# EAGLE board D-M-003_基板データ (EAGLE 9.7.0)
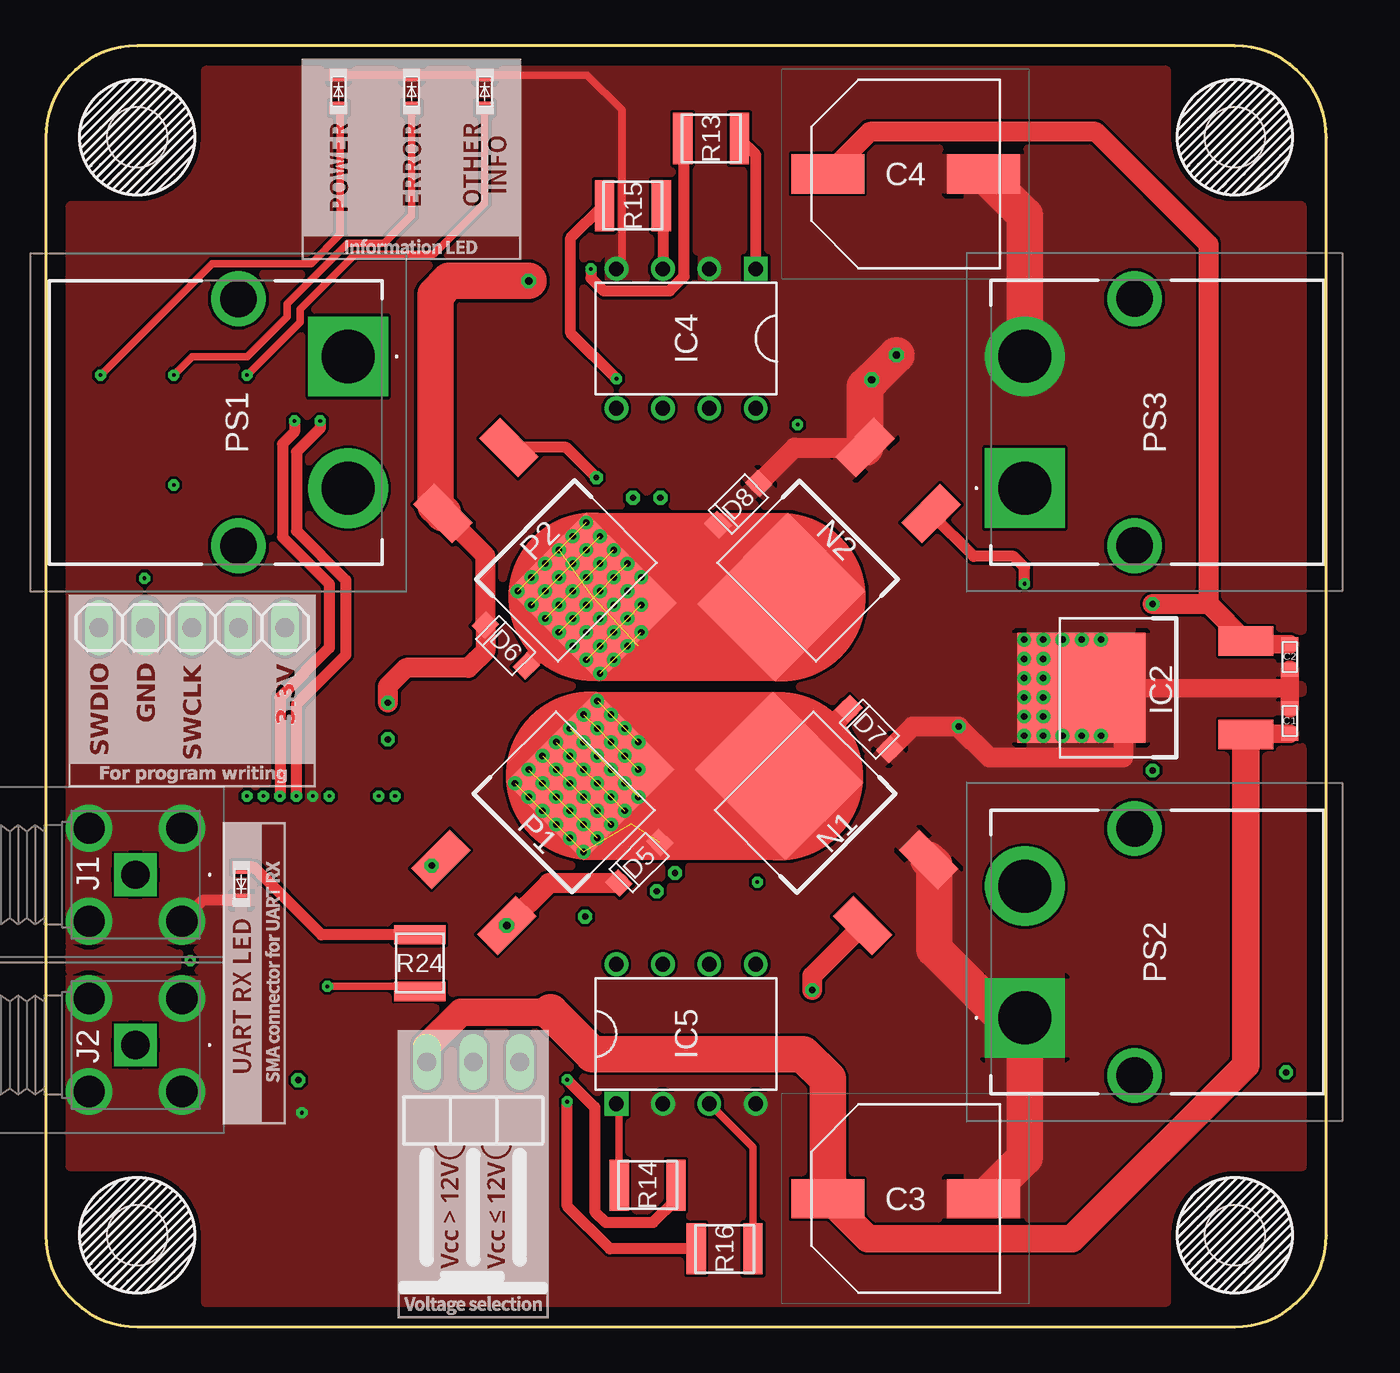
[diagram p0: board, top side]
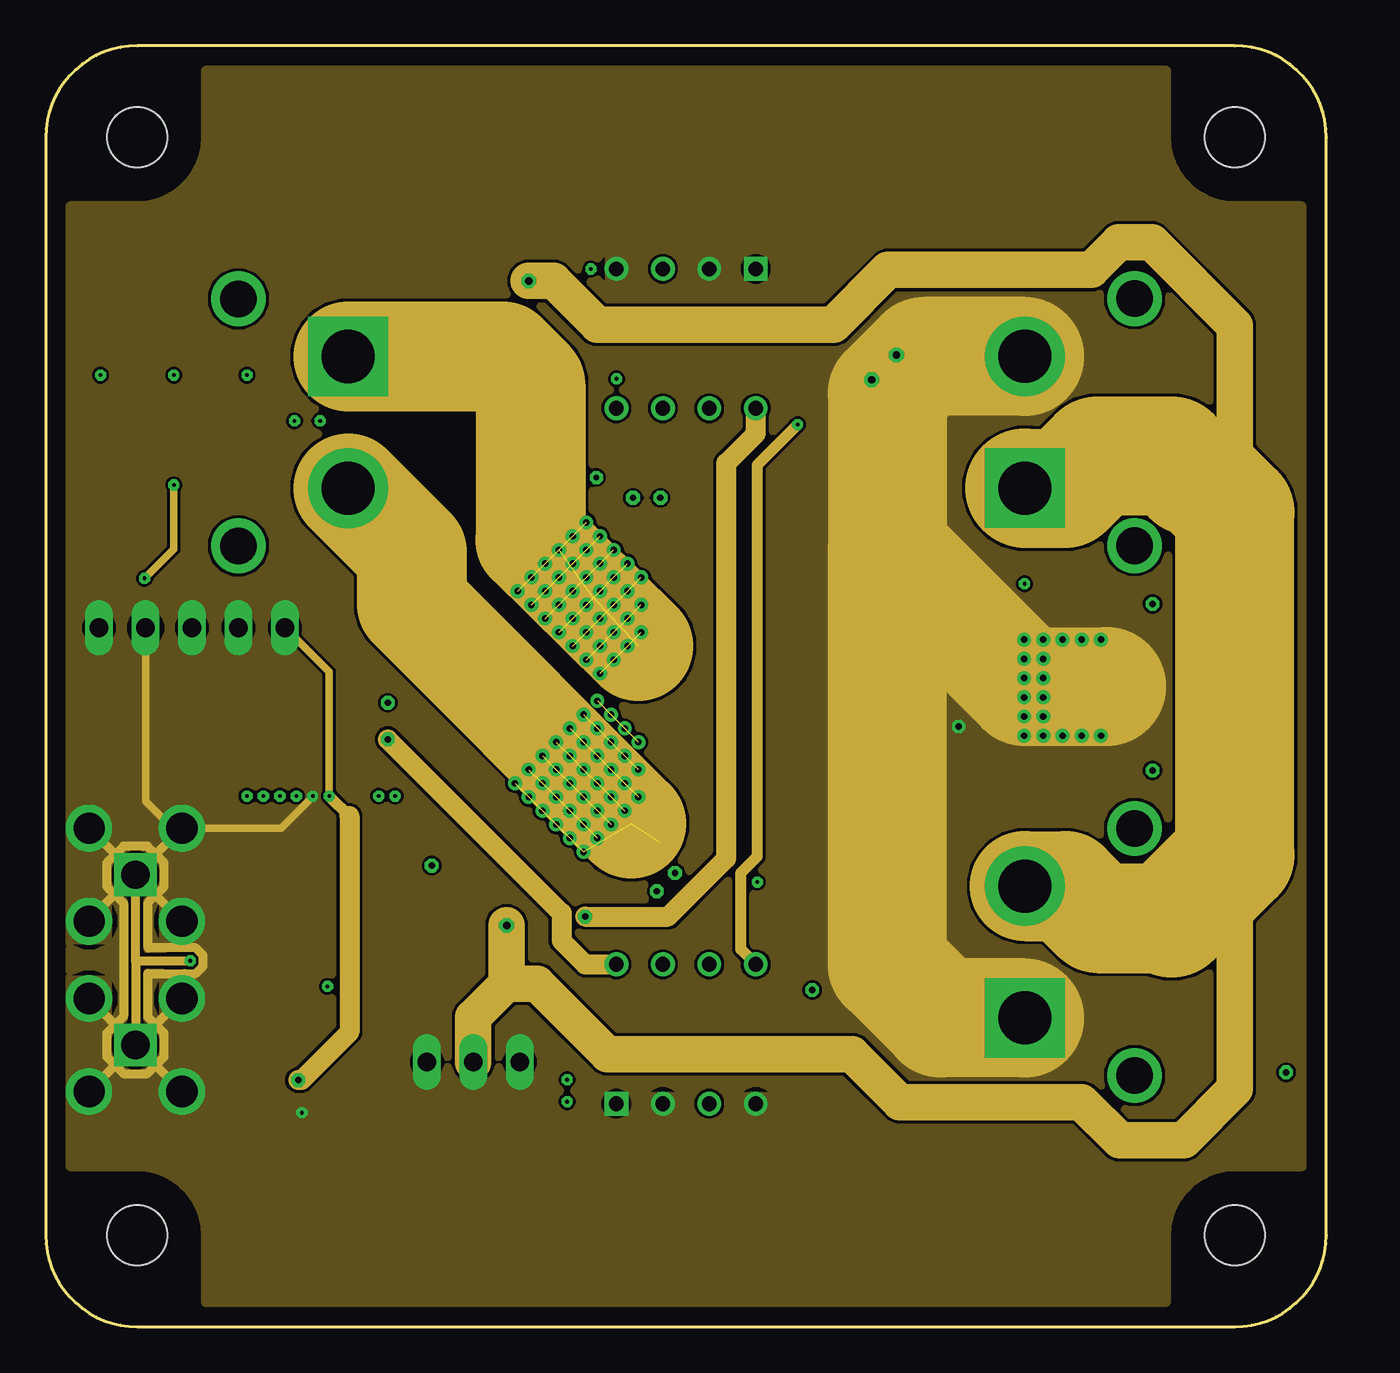
[diagram p1: board, inner layer Route2]
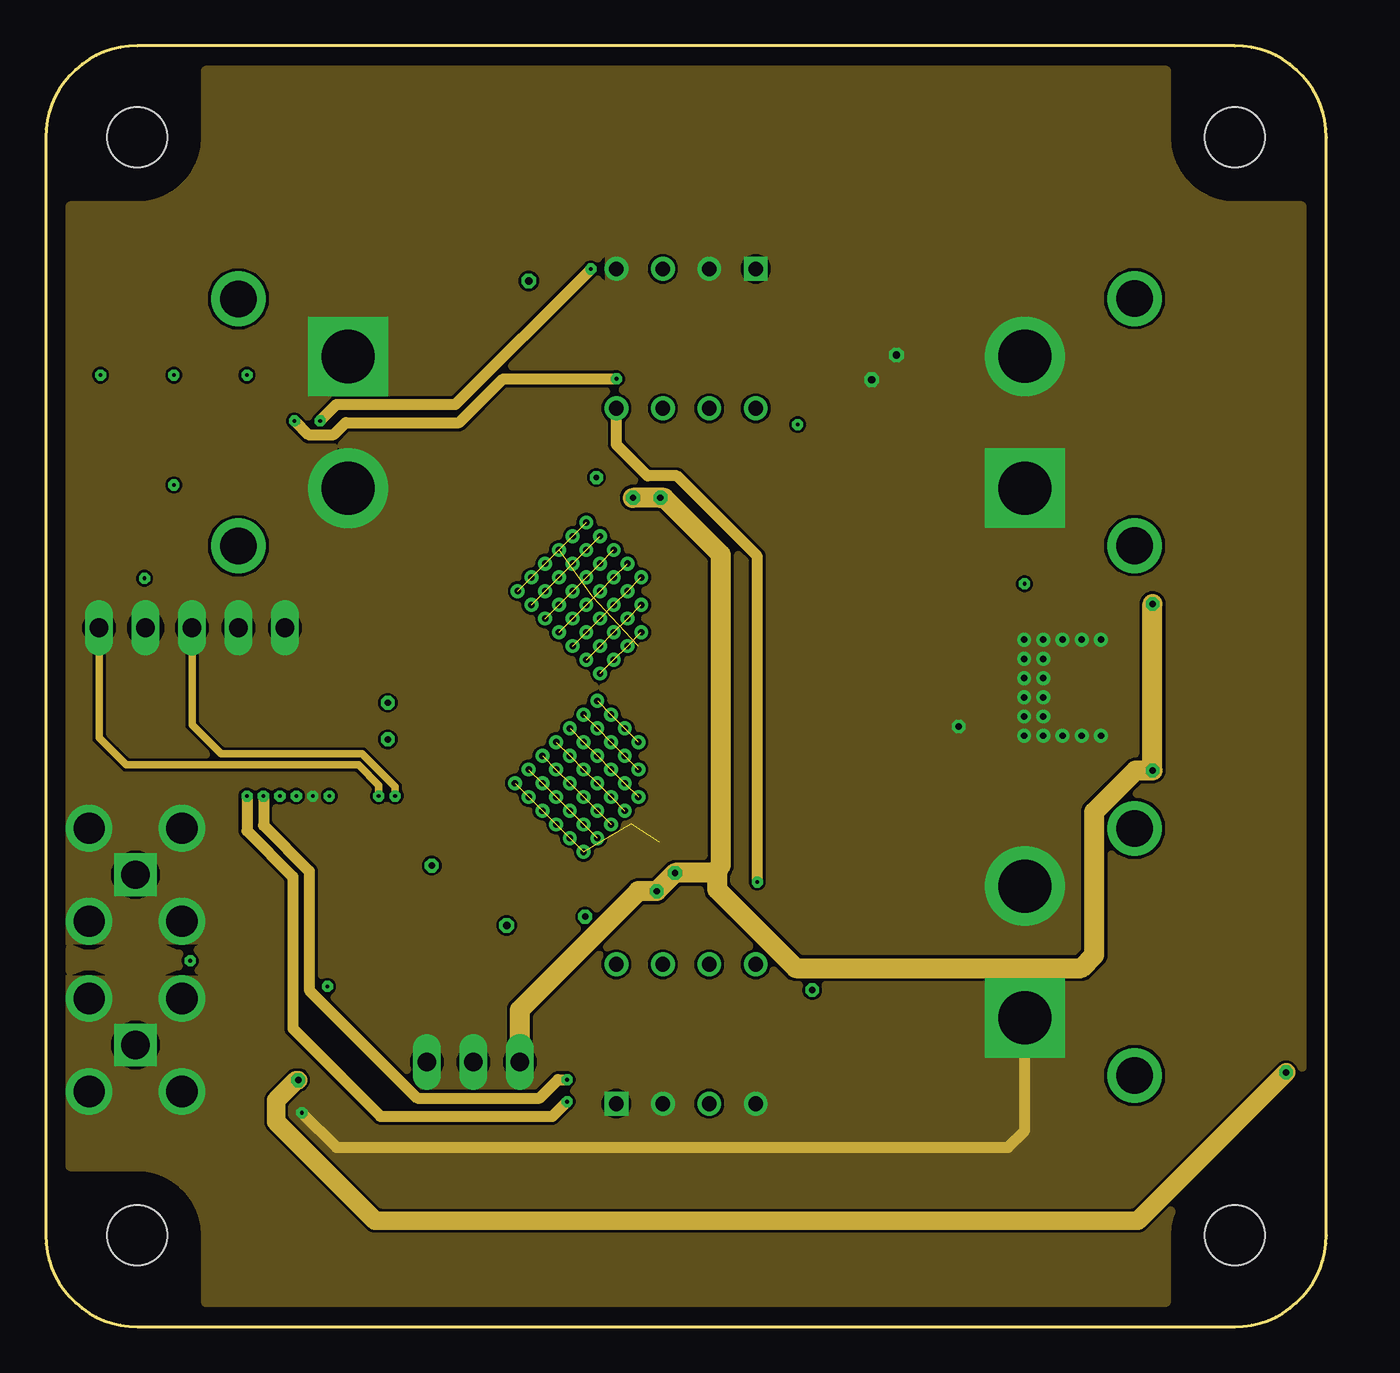
[diagram p2: board, inner layer Route15]
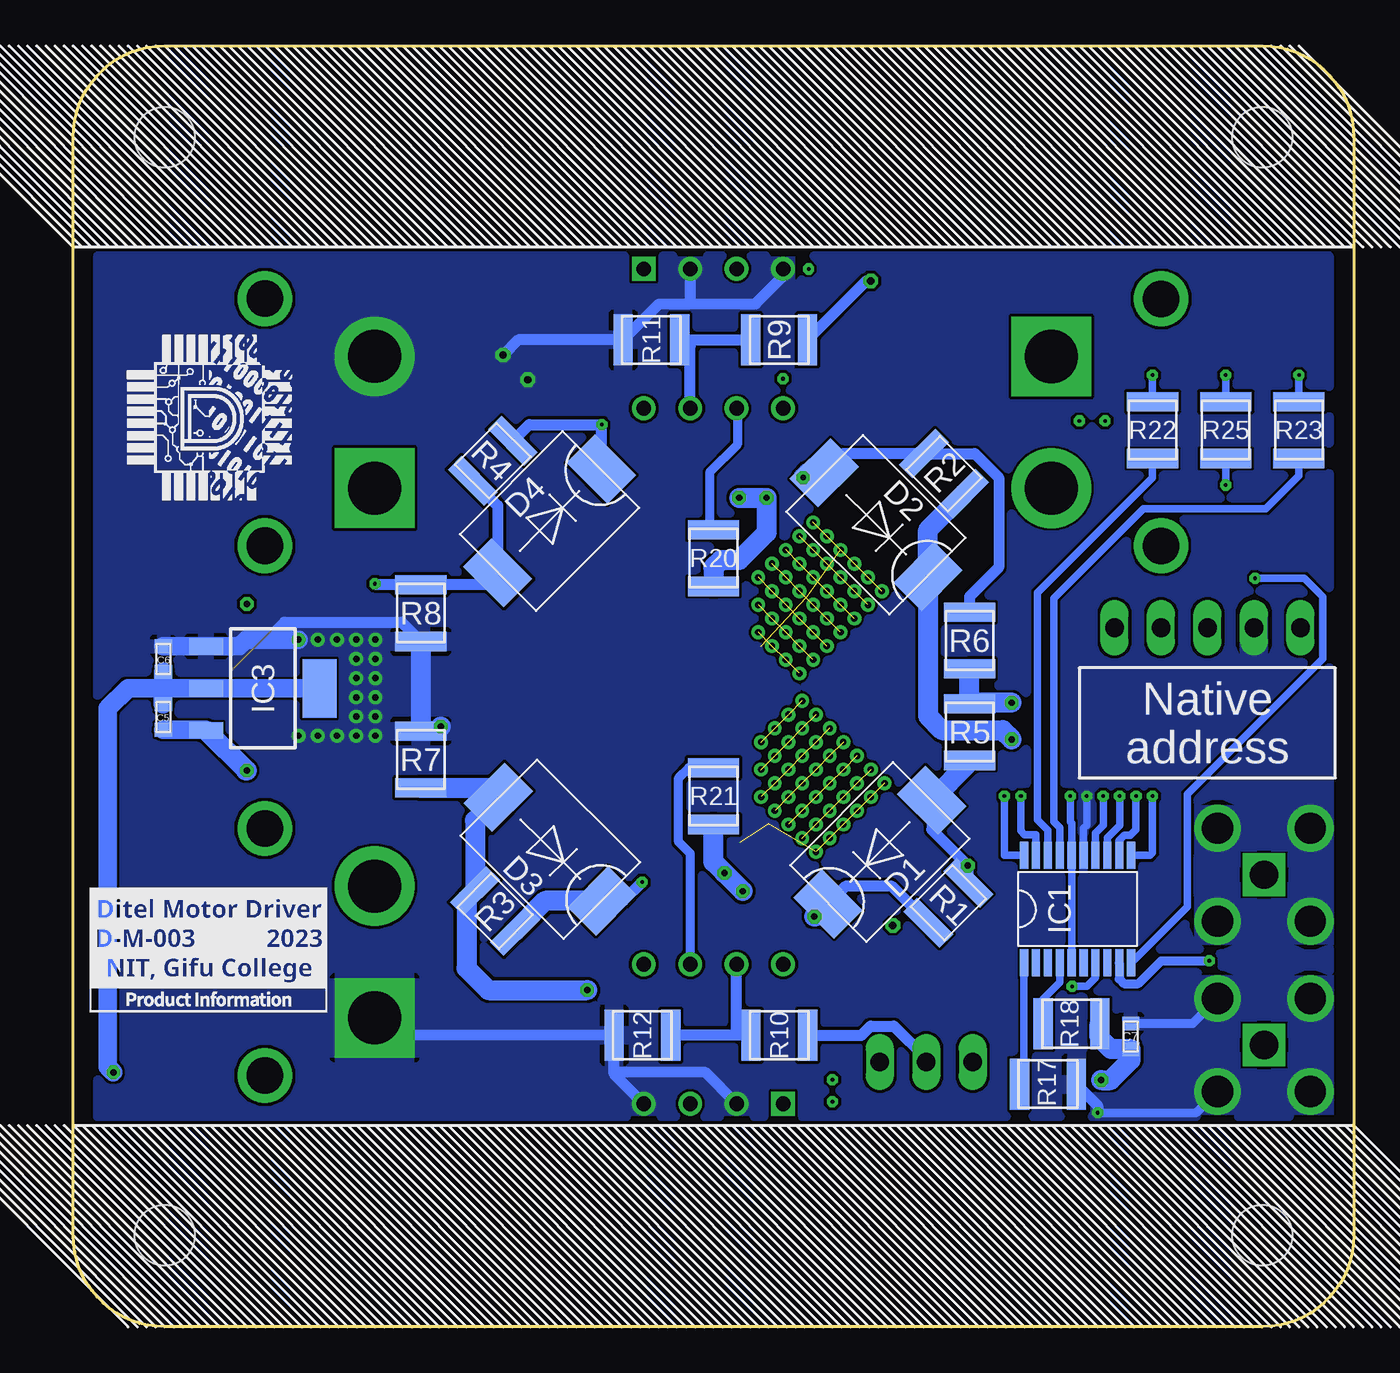
[diagram p3: board, bottom side, seen from below]

Size 70 x 70 mm. Coordinates in mm from the lower left corner, seen from the top.
Outline: 0,5 arc90 5,0 65,0 arc90 70,5 70,65 arc90 65,70 5,70 arc90 0,65 0,5
Copper layers (1+2*15+16): Top / Route2 / Route15 / Bottom
Stack-up 4 Layer Stack: Top SilkScreen Epoxy Ink / Top SolderMask SR:Green 0.0254mm Dk 4.3 / Top Surface Finish Lead-Free 0.02mm / Top CuFoil:007 0.035mm / Dielectric-1 Prepreg:001 0.064mm / Dielectric-2 Prepreg:001 0.064mm / Route2 CuFoil:007 0.035mm / Dielectric-3 Core:066 0.711mm / Route15 CuFoil:007 0.035mm / Dielectric-4 Prepreg:001 0.064mm / Dielectric-5 Prepreg:001 0.064mm / Bottom CuFoil:007 0.035mm / Bottom Surface Finish Lead-Free 0.02mm / Bottom SolderMask SR:Green 0.0254mm Dk 4.3 / Bottom SilkScreen Epoxy Ink
Design rules "default *": minimum track width 6mil, minimum drill 0.35mm, track to track 6mil, track to pad 6mil, pad to pad 6mil, via to via 6mil, smd to smd 6mil, copper to edge 40mil, drill to drill 6mil, minimum pad ring 10mil, minimum via ring 8mil, stop-mask expansion 4mil, vias tented up to drill 0mil, thermal gap 10mil
Holes 3.3 mm at 65,65 65,5 5,5 5,65

## Footprints (pad centres in the part's own frame; a part is rotated, then mirrored left to right if it is on the bottom)
CAPC1608X90N = smd 0.75 x 0.94: 1 -0.7,0; 2 0.7,0
CAPAE1030X1050N = smd 4 x 2.15: 1 -4.25,0; 2 4.25,0
DIOM7959X262N = smd 2.2 x 3.15: 1 -4.008,0; 2 4.008,0
SODFL3618X110N = smd 1 x 1.13: 1 -1.575,0; 2 1.575,0
SOP65P640X120-20N = smd 1.475 x 0.45: 1 -2.938,2.925; 2 -2.938,2.275; 3 -2.938,1.625; 4 -2.938,0.975; 5 -2.938,0.325; 6 -2.938,-0.325; 7 -2.938,-0.975; 8 -2.938,-1.625; 9 -2.938,-2.275; 10 -2.938,-2.925; 11 2.938,-2.925; 12 2.938,-2.275; 13 2.938,-1.625; 14 2.938,-0.975; 15 2.938,-0.325; 16 2.938,0.325; 17 2.938,0.975; 18 2.938,1.625; 19 2.938,2.275; 20 2.938,2.925
NJM7812SDL1 = smd 6 x 7: GND 0,9 | smd 1.6 x 3: VIN -2.55,0; VOUT 2.55,0
SOT230P700X180-4N = smd 1.85 x 0.9: 1 -3.1,2.3; 2 -3.1,0; 3 -3.1,-2.3 | smd 1.85 x 3.2: 4 3.1,0
DIP762W60P254L966H485Q8N = drill 0.8 pad 1.2 square: 1 -3.81,3.81 | drill 0.8 pad 1.2: 2 -3.81,1.27; 3 -3.81,-1.27; 4 -3.81,-3.81; 5 3.81,-3.81; 6 3.81,-1.27; 7 3.81,1.27; 8 3.81,3.81
S037TGG = drill 1.55 pad 2.325 square: 1 0,0 | drill 1.7 pad 2.55: 2 -2.54,-2.54; 3 2.54,-2.54; 4 2.54,2.54; 5 -2.54,2.54
1X03/90 = drill 1.016 long: 1 -2.54,-3.81; 2 0,-3.81; 3 2.54,-3.81
1X05 = drill 1.016 long: 1 -5.08,0; 2 -2.54,0; 3 0,0; 4 2.54,0; 5 5.08,0
LEDC1608X36N = smd 0.7 x 0.95: 1 -0.9,0; 2 0.9,0
NP52N06SLG-E1-AY = smd 6 x 7: D 0,0.11 | smd 1.6 x 3: G -2.55,-8.89; S 2.55,-8.89
TJ60S04M3L = smd 6 x 7: D 0,0.11 | smd 1.6 x 3: G -2.55,-8.89; S 2.55,-8.89
XT60PWM = drill 2.9 pad 4.35 square: 1 0,0 | drill 2.9 pad 4.35: 2 7.2,0 | drill 2 pad 3: MH1 -3.15,-6; MH2 10.35,-6
RESC3226X70N = smd 1.05 x 2.8: 1 -1.55,0; 2 1.55,0

## Placement (x,y rotation side)
C1  GRM188F11H104ZA01D  [CAPC1608X90N]  68,33.1 90 top
C2  GRM188F11H104ZA01D  [CAPC1608X90N]  68,36.6 90 top
C3  63SGV100M10X10.5  [CAPAE1030X1050N]  47,7 0 top
C4  63SGV100M10X10.5  [CAPAE1030X1050N]  47,63 0 top
C5  GRM188F11H104ZA01D  [CAPC1608X90N]  65.07,33.32 270 bottom
C6  GRM188F11H104ZA01D  [CAPC1608X90N]  65.07,36.49 270 bottom
C7  GRM188F11H104ZA01D  [CAPC1608X90N]  12.19,15.87 270 bottom
D1  SK54  [DIOM7959X262N]  25.91,25.94 45 bottom
D2  SK54  [DIOM7959X262N]  26.11,43.83 135 bottom
D3  SK54  [DIOM7959X262N]  43.92,26.1 135 bottom
D4  SK54  [DIOM7959X262N]  43.97,44.03 225 bottom
D5  GS1010FL  [SODFL3618X110N]  32.44,25.36 45 top
D6  GS1010FL  [SODFL3618X110N]  25.15,37.23 315 top
D7  GS1010FL  [SODFL3618X110N]  45.02,32.66 315 top
D8  GS1010FL  [SODFL3618X110N]  37.86,44.96 45 top
IC1  STM32L010F4P6  [SOP65P640X120-20N]  15.1,22.83 90 bottom
IC2  NJM7812SDL1  [NJM7812SDL1]  65.6,34.92 90 top
IC3  AZ1117CH-3.3TRG1  [SOT230P700X180-4N]  59.63,34.88 0 bottom
IC4  TLP621-2_GB,T_  [DIP762W60P254L966H485Q8N]  35,54 270 top
IC5  TLP621-2_GB,T_  [DIP762W60P254L966H485Q8N]  35,16 90 top
J1  S-037-TGG  [S037TGG]  4.91,24.7 0 top
J2  S-037-TGG  [S037TGG]  4.91,15.4 0 top
JP1  [1X03/90]  23.37,10.65 180 top
JP2  [1X05]  8,38.2 0 top
LED1  SML-E12P8WT86  [LEDC1608X36N]  24,67.5 270 top
LED2  SML-E12P8WT86  [LEDC1608X36N]  16,67.5 270 top
LED3  SML-E12P8WT86  [LEDC1608X36N]  10.69,24.2 90 top
LED4  SML-E12P8WT86  [LEDC1608X36N]  20,67.5 270 top
N1  NP52N06SLG-E1-AY  [NP52N06SLG-E1-AY]  40.17,30.02 45 top
N2  NP52N06SLG-E1-AY  [NP52N06SLG-E1-AY]  40.3,39.95 135 top
P1  TJ60S04M3L  [TJ60S04M3L]  29.68,30.02 315 top
P2  TJ60S04M3L  [TJ60S04M3L]  29.8,39.96 225 top
PS1  XT60PW-M  [XT60PWM]  16.53,53.02 270 top
PS2  XT60PW-M  [XT60PWM]  53.52,16.88 90 top
PS3  XT60PW-M  [XT60PWM]  53.52,45.83 90 top
R1  RK73B2ETTD101J  [RESC3226X70N]  22.16,23.17 45 bottom
R2  RK73B2ETTD101J  [RESC3226X70N]  22.4,46.62 315 bottom
R3  RK73B2ETTD101J  [RESC3226X70N]  46.94,22.72 135 bottom
R4  RK73B2ETTD101J  [RESC3226X70N]  47.06,47.32 45 bottom
R5  RK73B2ETTD223J  [RESC3226X70N]  21,32.5 90 bottom
R6  RK73B2ETTD223J  [RESC3226X70N]  21,37.5 270 bottom
R7  RK73B2ETTD223J  [RESC3226X70N]  51,31 270 bottom
R8  RK73B2ETTD223J  [RESC3226X70N]  51,39 90 bottom
R9  RK73B2ETTD132J  [RESC3226X70N]  31.41,53.93 0 bottom
R10  RK73B2ETTD132J  [RESC3226X70N]  31.4,15.93 0 bottom
R11  RK73B2ETTD132J  [RESC3226X70N]  38.39,53.93 0 bottom
R12  RK73B2ETTD132J  [RESC3226X70N]  38.88,15.93 0 bottom
R13  RK73B2ETTD101J  [RESC3226X70N]  36.37,64.93 0 top
R14  RK73B2ETTD101J  [RESC3226X70N]  32.9,7.74 0 top
R15  RK73B2ETTD101J  [RESC3226X70N]  32.1,61.26 180 top
R16  RK73B2ETTD101J  [RESC3226X70N]  37.11,4.26 180 top
R17  RK73B2ETTD103J  [RESC3226X70N]  16.72,13.26 180 bottom
R18  RK73B2ETTD103J  [RESC3226X70N]  15.43,16.56 180 bottom
R20  RK73B2ETTD681J  [RESC3226X70N]  35,42 270 bottom
R21  RK73B2ETTD681J  [RESC3226X70N]  35,29 270 bottom
R22  RK73B2ETTD101J  [RESC3226X70N]  11,49 90 bottom
R23  RK73B2ETTD101J  [RESC3226X70N]  3,49 90 bottom
R24  RK73B2ETTD101J  [RESC3226X70N]  20.45,19.87 90 top
R25  RK73B2ETTD101J  [RESC3226X70N]  7,49 90 bottom

## Library data of the parts
C1 C2 C5-C7 = GRM188F11H104ZA01D_2; DESCRIPTION: Multilayer Ceramic Capacitors MLCC - SMD/SMT 0603 0.10uF 50volt F +80/-20%; HEIGHT: 0.9mm; MANUFACTURER_NAME: Murata Electronics; MANUFACTURER_PART_NUMBER: GRM188F11H104ZA01D; MOUSER_PART_NUMBER: 81-GRM188F11H104ZA1D; MOUSER_PRICE-STOCK: https://www.mouser.co.uk/ProductDetail/Murata-Electronics/GRM188F11H104ZA01D?qs=f2jQ6kmD2TvlbTQfIom8Rw%3D%3D
C3 C4 = 63SGV100M10X10.5; DESCRIPTION: CAP ALUM 100UF 20% 63V SMD; HEIGHT: 10.5mm; MANUFACTURER_NAME: Rubycon; MANUFACTURER_PART_NUMBER: 63SGV100M10X10.5
D1-D4 = SK54; DESCRIPTION: surface mount schottky barrier rectifier; HEIGHT: 2.62mm; MANUFACTURER_NAME: PANJIT; MANUFACTURER_PART_NUMBER: SK54
D5-D8 = GS1010FL; DESCRIPTION: Surface general purpose rectifier; HEIGHT: 1.1mm; MANUFACTURER_NAME: PANJIT; MANUFACTURER_PART_NUMBER: GS1010FL
IC1 = STM32L010F4P6; ARROW_PART_NUMBER: STM32L010F4P6; ARROW_PRICE-STOCK: https://www.arrow.com/en/products/stm32l010f4p6/stmicroelectronics?region=nac; DESCRIPTION: STMICROELECTRONICS - STM32L010F4P6 - MCU, 32BIT, 32MHZ, TSSOP-20; HEIGHT: 1.2mm; MANUFACTURER_NAME: STMicroelectronics; MANUFACTURER_PART_NUMBER: STM32L010F4P6; MOUSER_PART_NUMBER: 511-STM32L010F4P6; MOUSER_PRICE-STOCK: https://www.mouser.co.uk/ProductDetail/STMicroelectronics/STM32L010F4P6?qs=PqoDHHvF64%252BtQ%252BKLA1pMLA%3D%3D
IC2 = NJM7812SDL1
IC3 = AZ1117CH-3.3TRG1; ARROW_PART_NUMBER: AZ1117CH-3.3TRG1; ARROW_PRICE-STOCK: https://www.arrow.com/en/products/az1117ch-3.3trg1/diodes-incorporated?region=nac; DESCRIPTION: 1.35A 3.3V LDO Reg. Current Limit SOT223 DiodesZetex AZ1117CH-3.3TRG1, LDO Voltage Regulator, 0.8A, 3.3 V +/-1%, maximum of 15 Vin, 3-Pin SOT-223; HEIGHT: 1.8mm; MANUFACTURER_NAME: Diodes Inc.; MANUFACTURER_PART_NUMBER: AZ1117CH-3.3TRG1; MOUSER_PART_NUMBER: 621-AZ1117CH-3.3TRG1; MOUSER_PRICE-STOCK: https://www.mouser.co.uk/ProductDetail/Diodes-Incorporated/AZ1117CH-3.3TRG1?qs=FKu9oBikfSm7ntaG6olPSQ%3D%3D
IC4 IC5 = TLP621-2_GB_T_; DESCRIPTION: PROGRAMMABLE CONTROLLER AC/DC-INPUT MODULE SOLID STATE RELAY; HEIGHT: 4.85mm; MANUFACTURER_NAME: Toshiba; MANUFACTURER_PART_NUMBER: TLP621-2(GB,T)
J1 J2 = S-037-TGG; DESCRIPTION: Horizontal SMA connector for board; HEIGHT: 10.3mm; MANUFACTURER_NAME: Cosmtec; MANUFACTURER_PART_NUMBER: S-037-TGG
JP1 JP2 = pinhead
LED1-LED4 = SML-E12P8WT86; ARROW_PART_NUMBER: SML-E12P8WT86; ARROW_PRICE-STOCK: https://www.arrow.com/en/products/sml-e12p8wt86/rohm-semiconductor; DESCRIPTION: Standard LEDs - SMD SMD Green 2.5-16 mcd; HEIGHT: 0.36mm; MANUFACTURER_NAME: ROHM Semiconductor; MANUFACTURER_PART_NUMBER: SML-E12P8WT86; MOUSER_PART_NUMBER: 755-SML-E12P8WT86; MOUSER_PRICE-STOCK: https://www.mouser.co.uk/ProductDetail/ROHM-Semiconductor/SML-E12P8WT86?qs=4kLU8WoGk0vBFbk40ZI0Fw%3D%3D
N1 N2 = NP52N06SLG-E1-AY
P1 P2 = TJ60S04M3L; DESCRIPTION: P-Channel 40 V 60A (Ta) 90W (Tc) Surface Mount DPAK+; HEIGHT: 2.7mm; MANUFACTURER_NAME: Toshiba; MANUFACTURER_PART_NUMBER: TJ60S04M3L
PS1-PS3 = XT60PW-M; DESCRIPTION: Socket; DC supply; XT60; male; PIN: 2; on PCBs; THT; yellow; 30A; 500V; HEIGHT: 8.4mm; MANUFACTURER_NAME: Changzhou Amass Elec; MANUFACTURER_PART_NUMBER: XT60PW-M
R1-R16 R20-R25 = RK73B2ETTDxxxJ
R17 R18 = RK73B2ETTDxxxJ; ARROW_PART_NUMBER: RK73B2ETTD103J; ARROW_PRICE-STOCK: https://www.arrow.com/en/products/rk73b2ettd103j/koa-speer-electronics?region=nac; DESCRIPTION: Thick Film Resistors - SMD 1/2watts 10Kohms 5%; HEIGHT: 0.7mm; MANUFACTURER_NAME: KOA Speer; MANUFACTURER_PART_NUMBER: RK73B2ETTD103J; MOUSER_PART_NUMBER: 660-RK73B2ETTD103J; MOUSER_PRICE-STOCK: https://www.mouser.co.uk/ProductDetail/KOA-Speer/RK73B2ETTD103J?qs=mo7YAoQKm%252BktSZhsgwlHSA%3D%3D

## Nets
3.3V: C5.1 C6.2 C7.2 IC1.5 IC1.16 IC3.2 IC3.4 JP2.5 R18.1
GND: C1.2 C2.1 C3.2 C4.2 C6.1 C7.1 D7.2 D8.2 IC1.15 IC2.GND IC3.1 IC4.2 IC4.4 IC5.2 IC5.4 J1.2 J1.3 J1.4 J1.5 J2.2 J2.3 J2.4 J2.5 JP2.2 LED1.1 LED2.1 LED3.1 LED4.1 N1.S N2.S PS2.1 PS3.2 R7.1 R8.1 R11.1 R12.1 R17.1
LED1: IC1.18 R22.1
LED2: IC1.17 R23.1
LED3: IC1.7 R24.1
LED4: IC1.10 R25.1
N$1: D5.2 D7.1 N1.D P1.D PS1.2
N$2: D2.1 IC5.8 R2.2
N$3: D2.2 P2.G R2.1 R6.1
N$4: D1.1 IC4.8 R1.1
N$5: D1.2 P1.G R1.2 R5.1
N$6: D4.2 N2.G R4.1 R8.2
N$7: IC1.1 R17.2
N$8: D3.1 IC4.5 R3.1
N$9: IC5.7 R10.1 R12.2
N$11: IC4.6 R20.1
N$12: IC4.1 R13.2
N$13: IC5.1 R14.1
N$14: IC1.4 R18.2
N$16: IC5.3 R16.1
N$17: D6.2 D8.1 N2.D P2.D PS1.1
N$19: IC4.3 R15.1
N$21: D4.1 IC5.5 R4.2
N$22: D3.2 N1.G R3.2 R7.2
N$23: C1.1 C3.1 IC2.VIN JP1.3
N$27: LED1.2 R22.2
N$28: IC5.6 R21.1
N$30: LED2.2 R23.2
N$31: IC4.7 R9.1 R11.2
N$33: LED3.2 R24.2
N$36: LED4.2 R25.2
SIG_N1: IC1.14 R13.1
SIG_N2: IC1.12 R14.2
SIG_P1: IC1.13 R15.2
SIG_P2: IC1.11 R16.2
SWCLK: IC1.20 JP2.3
SWDIO: IC1.19 JP2.1
UART_RX: IC1.9 J1.1 J2.1
UART_TX: IC1.8
VCC: D5.1 D6.1 JP1.2 P1.S P2.S PS2.2 PS3.1 R5.2 R6.2 R9.2 R10.2
~12V: C2.2 C4.1 C5.2 IC2.VOUT IC3.3 JP1.1 R20.2 R21.2

## Tracks (layer width: path | path; a pad name or v marks a point on that pad's centre or on a via)
3.3V  (via drill 0.2, 0.35)
  Route2 0.4: v15.5,29 15.5,35.78 JP2.5
  Route2 0.6: v15.5,29 16.6,27.9
  Route2 1.1: 16.6,27.9 16.6,16.1 13.98,13.48 v13.8,13.48
  Route15 1: v67.8,13.9 59.7,5.8 18,5.8 12.6,11.2 12.6,12.38 13.7,13.48 v13.8,13.48
  Bottom 0.4: v15.5,29 15.5,27.6 15.42,27.52 IC1.16 IC1.5
  Bottom 0.5: 12.49,15.17 C7.2
  Bottom 1: IC3.4 IC3.2 65.08,34.88 | 65.08,34.88 65.1,34.9 | 65.1,34.9 65.1,34.05 C5.1 | C6.2 65.08,34.88 | 65.1,34.9 67,34.9 68.1,33.8 68.1,14.2 v67.8,13.9
  Bottom 1.1: R18.1 13.9,16.54 13.9,15.8 13.27,15.17 C7.2 12.19,14.59 13.3,13.48 v13.8,13.48
GND  (via drill 0.2, 0.35, 0.4)
  Top 0.4: IC4.4 31.5,58.12 31.5,66.5 29.6,68.4 LED1.1 LED4.1 LED2.1
  Top 0.6: LED3.1 8.59,23.3 J1.3
  Top 1: C2.1 68,34.9 | 68,34.9 C1.2 | 68,34.9 56.62,34.9 IC2.GND
  Top 1.1: D8.2 40.94,48.04 N2.S | D7.2 47.39,32.8 v49.9,32.8 51.6,31.1 58.9,31.1 58.9,32.62 IC2.GND
  Top 2: N2.S 44.78,51.38 v45.15,51.75 v46.5,53.1 | N1.S 48.57,25.23 48.57,20.63 52.32,16.88 PS2.1 53.52,9.27 C3.2 | PS3.2 53.52,60.73 C4.2
  Route2 0.4: 6.95,27.24 5.46,28.73 JP2.2 | J1.4 12.87,27.24 14.6,28.97 v14.6,29
  Route2 0.5: 6.95,27.24 J1.4 6.02,25.81 6.01,25.81 | J1.3 6.02,23.59 6.01,23.59 | 6.01,23.59 6.47,24.05 6.47,25.35 6.01,25.81 | 6.01,25.81 5.55,26.27 4.26,26.27 3.8,25.8 | 3.8,25.8 3.34,25.35 3.34,24.05 3.77,23.62 | 3.77,23.62 4.25,23.14 4.25,16.96 3.8,16.5 | 3.8,16.5 3.34,16.05 3.34,14.75 3.8,14.3 | 3.8,14.3 4.26,13.84 5.55,13.84 6.04,14.31 | 6.04,14.31 6.47,14.75 6.47,16.05 6.01,16.51 | J2.3 6.04,14.27 6.04,14.31 | J2.2 3.8,14.29 3.8,14.3 | J2.5 3.8,16.51 3.8,16.5 | J1.2 2.37,22.22 3.77,23.62 | J1.5 3.8,25.81 3.8,25.8 | 6.01,16.51 5.6,16.92 5.6,19.3 7.6,19.3 7.61,19.29 8.19,19.29 8.61,19.71 8.61,20.29 8.19,20.71 5.61,20.71 5.61,23.18 6.01,23.59 | J2.4 6.02,16.51 6.01,16.51
  Route2 2: v46.5,53.1 53.45,53.1 PS3.2
  Route2 6.5: 46,42.5 53.52,34.98 58,35 | 46,42.5 46,51 48.03,53.03 PS3.2 | 46,42.5 46,19.8 48.92,16.88 PS2.1
  Route15 0.6: v14,11.7 15.9,9.8 52.6,9.8 53.52,10.72 PS2.1
  Bottom 0.4: IC1.15 14.77,27.23 14.6,27.4 v14.6,29 | 52.57,15.93 PS2.1
  Bottom 0.5: C7.1 8.82,16.57 J2.4 | v14,11.7 8.61,11.7 J2.3
  Bottom 0.6: 52.57,15.93 R12.1 40.43,13.9 | IC5.2 35.44,13.9 40.43,13.9 | v46.5,53.1 45.67,53.93 R11.1 37.97,55.9 36.3,55.9 | 36.3,55.9 32.7,55.9 31.19,57.41 IC4.4 | IC4.2 36.27,55.93 36.3,55.9 | 59.4,37.55 58.45,38.5 52.05,38.5 R8.1 | R17.1 14,12.09 v14,11.7 | IC5.4 40.43,13.81 40.43,13.9
  Bottom 1: C6.1 IC3.1 60.92,37.18 60.55,37.55 59.4,37.55 v57.68,37.55
  Bottom 1.1: v49.9,32.8 50.15,32.55 R7.1 R8.1
  other vias: 53.48,37.55 53.48,36.49 53.48,35.45 53.48,34.4 53.48,33.34 53.48,32.3 57.68,32.3 54.53,37.55 54.53,36.49 54.53,35.45 54.53,34.4 54.53,33.34 54.53,32.3 55.58,37.55 55.58,32.3 56.63,37.55 56.63,32.3
  pour Bottom: 0.25,58.75 69.75,58.75 69.75,11.25 0.25,11.25
  pour Route15: 5,61.5 arc90 8.5,65 8.5,69.75 61.5,69.75 61.5,65 arc90 65,61.5 69.75,61.5 69.75,8.5 65,8.5 arc90 61.5,5 61.5,0.25 8.5,0.25 8.5,5 arc90 5,8.5 0.25,8.5 0.25,61.5
  pour Route2: 5,61.5 arc90 8.5,65 8.5,69.75 61.5,69.75 61.5,65 arc90 65,61.5 69.75,61.5 69.75,8.5 65,8.5 arc90 61.5,5 61.5,0.25 8.5,0.25 8.5,5 arc90 5,8.5 0.25,8.5 0.25,61.5
  pour Top: 5,61.5 arc90 8.5,65 8.5,69.75 61.5,69.75 61.5,65 arc90 65,61.5 69.75,61.5 69.75,8.5 65,8.5 arc90 61.5,5 61.5,0.25 8.5,0.25 8.5,5 arc90 5,8.5 0.25,8.5 0.25,61.5
LED1
  Bottom 0.4: IC1.18 16.72,27.12 17.3,27.7 17.3,29 17.3,40.1 11,46.4 R22.1
LED2
  Bottom 0.4: IC1.17 16.07,27.27 16.4,27.6 16.4,29 16.4,39.8 11.5,44.7 4.8,44.7 3,46.5 R23.1
LED3  (via drill 0.2)
  Top 0.4: v15.4,18.6 15.42,18.62 20.15,18.62 R24.1
  Bottom 0.4: IC1.7 14.12,19.08 14.6,18.6 v15.4,18.6
LED4  (via drill 0.2)
  Route2 0.4: v5.4,40.9 7,42.5 v7,46
  Bottom 0.4: R25.1 v7,46 | R25.1 | IC1.10 9.1,22.96 9.1,29.1 1.7,36.5 1.7,39.9 2.7,40.9 v5.4,40.9
N$1  (via drill 0.35)  (7 unrouted)
  Top 1.016: P1.D D5.2
  Top 1.1: D7.1 40.23,30.09 N1.D 37.17,30.09 D5.2 33.38,26.47 P1.D
  Top 9.2: N1.D P1.D
  Route2 6: PS1.2 20,42.35 20,39.5 32,27.5
  other vias: 29.4,25.95 28.65,26.7 27.9,27.45 27.15,28.2 26.4,28.95 25.65,29.7
N$2  (via drill 0.35)
  Route2 1.1: v18.7,32.1 28.2,22.6 28.2,21.1 29.49,19.81 IC5.8
  Bottom 1.1: R2.2 23.28,43.55 D2.1 23.28,33.38 22.5,32.6 19.2,32.6 v18.7,32.1
N$3  (via drill 0.3)
  Top 0.6: v30.1,46.4 28.45,48.05 P2.G
  Bottom 0.6: D2.2 27.89,47.72 R2.1 20.72,47.72 19.4,46.4 19.4,41.5 21,39.9 R6.1
  Bottom 1.1: D2.2 29.84,46.66 v30.1,46.4
N$4  (via drill 0.35)
  Route2 1.1: IC4.8 38.81,48.81 37.2,47.2 37.2,25.6 34.01,22.41 v29.49,22.41
  Bottom 0.6: D1.1 27.75,24.1 25.28,24.1 R1.1
  Bottom 1.1: D1.1 29.44,22.41 v29.49,22.41
N$5  (via drill 0.35)
  Top 0.6: v21.1,25.2 21.44,25.54 P1.G
  Bottom 0.6: R1.2 21.06,25.16 v21.1,25.2 23.07,27.17 D1.2
  Bottom 1.1: D1.2 21,30.85 R5.1
N$6  (via drill 0.2)
  Top 0.6: v53.5,40.6 53.5,41.5 52.9,42.1 50.72,42.1 N2.G
  Bottom 0.6: R4.1 46.8,44.87 D4.2 47.45,40.55 R8.2 53.45,40.55 v53.5,40.6
N$7
  Bottom 0.4: IC1.1 18.02,13.51 R17.2
N$8  (via drill 0.2)
  Route15 0.6: v38.9,24.3 38.9,42.1 34.5,46.5 32.9,46.5 31.19,48.21 IC4.5
  Bottom 0.6: D3.1 39.93,23.27 v38.9,24.3
  Bottom 1.1: D3.1 44.2,23.27 R3.1
N$9
  Bottom 0.6: R12.2 37.3,15.96 33.73,15.96 | 33.73,15.96 IC5.7 | 33.73,15.96 32.98,15.96 R10.1
N$11
  Bottom 0.5: IC4.6 33.7,50.16 33.7,48.2 35.21,46.69 35.21,43.76 R20.1
N$12
  Top 0.6: IC4.1 38.81,64.04 R13.2
N$13
  Top 0.4: R14.1 31.35,12.03 IC5.1
N$14
  Bottom 0.4: R18.2 16.98,17.92 16.07,18.83 IC1.4
N$16
  Top 0.4: R16.1 38.66,9.8 IC5.3
N$17  (via drill 0.35)  (7 unrouted)
  Top 1.016: N2.D D8.1 | P2.D D6.2
  Top 9.2: P2.D N2.D
  Route2 6: PS1.1 24.98,53.02 26.5,51.5 26.5,43 32.4,37.2
  other vias: 29.55,43.95 28.8,43.2 28.05,42.45 27.3,41.7 26.55,40.95 25.8,40.2
N$19
  Top 0.6: IC4.3 33.73,61.18 R15.1
N$21  (via drill 0.2)
  Route2 0.6: IC5.5 38,20.62 38,24.8 38.9,25.7 38.9,47.1 v41.1,49.3
  Bottom 0.6: D4.1 41.13,49.27 v41.1,49.3 45.08,49.3 R4.2
N$22  (via drill 0.35)
  Top 1.1: v41.9,18.4 41.9,19.17 N1.G
  Bottom 1.1: R7.2 47.27,29.45 D3.2 48.04,27.66 R3.2 48.5,23.35 48.5,19.6 47.3,18.4 v41.9,18.4
N$23
  Top 1: C1.1 65.63,32.4 IC2.VIN
  Top 1.5: 27.6,17.2 22.7,17.2 20.83,15.33 JP1.3 | C3.1 44.95,4.8 56.1,4.8 65.6,14.3 IC2.VIN
  Top 2: C3.1 42.75,13.55 41.4,14.9 29.9,14.9 27.6,17.2
N$26  (via drill 0.35)  (5 unrouted)
  other vias: 30.3,43.2 29.55,42.45 28.8,41.7 28.05,40.95 27.3,40.2 26.55,39.45
N$27  (via drill 0.2)
  Top 0.4: v11,52 13.9,54.9 13.9,55.6 16.9,58.6 21.2,58.6 24,61.4 LED1.2
  Bottom 0.4: R22.2 v11,52
N$28
  Bottom 0.5: IC5.6 36.27,25.87 36.9,26.5 36.9,30 36.35,30.55 R21.1
N$30  (via drill 0.2)
  Top 0.4: v3,52 9.1,58.1 14.5,58.1 16.1,59.7 16.1,66.5 LED2.2
  Bottom 0.4: R23.2 v3,52
N$31
  Bottom 0.6: R11.2 36.6,53.93 | 36.6,53.93 R9.1 | IC4.7 36.27,53.6 36.6,53.93
N$32  (via drill 0.35)  (5 unrouted)
  other vias: 31.05,42.45 30.3,41.7 29.55,40.95 28.8,40.2 28.05,39.45 27.3,38.7
N$33
  Top 0.6: R24.2 15.08,21.42 11.4,25.1 LED3.2
N$34  (via drill 0.35)  (5 unrouted)
  other vias: 31.8,41.7 31.05,40.95 30.3,40.2 29.55,39.45 28.8,38.7 28.05,37.95
N$35  (via drill 0.35)  (5 unrouted)
  other vias: 32.55,40.95 31.8,40.2 31.05,39.45 30.3,38.7 29.55,37.95 28.8,37.2
N$36  (via drill 0.2)
  Top 0.4: v7,52 8,53 11,53 13.2,55.2 13.2,55.9 16.5,59.2 18.5,59.2 20,60.7 LED4.2
  Bottom 0.4: R25.2 v7,52 | v7,52
N$37  (via drill 0.35)  (4 unrouted)
  other vias: 32.55,39.45 31.8,38.7 31.05,37.95 30.3,37.2 29.55,36.45
N$38  (via drill 0.35)  (3 unrouted)
  other vias: 32.55,37.95 31.8,37.2 31.05,36.45 30.3,35.7
N$39  (via drill 0.35)  (5 unrouted)
  other vias: 30.15,26.7 29.4,27.45 28.65,28.2 27.9,28.95 27.15,29.7 26.4,30.45
N$40  (via drill 0.35)  (5 unrouted)
  other vias: 30.9,27.45 30.15,28.2 29.4,28.95 28.65,29.7 27.9,30.45 27.15,31.2
N$41  (via drill 0.35)  (5 unrouted)
  other vias: 31.65,28.2 30.9,28.95 30.15,29.7 29.4,30.45 28.65,31.2 27.9,31.95
N$42  (via drill 0.35)  (5 unrouted)
  other vias: 32.4,28.95 31.65,29.7 30.9,30.45 30.15,31.2 29.4,31.95 28.65,32.7
N$43  (via drill 0.35)  (4 unrouted)
  other vias: 32.4,30.45 31.65,31.2 30.9,31.95 30.15,32.7 29.4,33.45
N$44  (via drill 0.35)  (3 unrouted)
  other vias: 32.4,31.95 31.65,32.7 30.9,33.45 30.15,34.2
SIG_N1  (via drill 0.2)
  Top 0.6: v13.7,29 13.7,34 16.4,36.7 16.4,40.8 13.7,43.5 13.7,47.8 15,49.1 v15,49.5 | v29.8,57.8 29.8,57.3 30.5,56.6 34.1,56.6 34.9,57.4 34.9,64.85 R13.1
  Route15 0.6: v15,49.5 15.9,50.4 22.4,50.4 v29.8,57.8
  Bottom 0.4: IC1.14 14.12,26.98 13.7,27.4 v13.7,29
SIG_N2  (via drill 0.2)
  Top 0.6: R14.2 34.45,6.95 33.2,5.7 30.6,5.7 30,6.3 30,12 v28.5,13.5
  Route15 0.6: v11.9,29 11.9,27.4 14.4,24.9 14.4,18.4 20.3,12.5 27,12.5 28,13.5 v28.5,13.5
  Bottom 0.4: IC1.12 12.85,25.79 12.85,26.55 12.54,26.86 12.2,26.86 11.9,27.16 v11.9,29
SIG_P1  (via drill 0.2)
  Top 0.6: v12.8,29 12.8,34.4 15.5,37.1 15.5,40.6 12.95,43.15 12.95,48.25 13.6,48.9 v13.6,49.5 | v31.2,51.8 28.7,54.3 28.7,59.5 30.46,61.26 R15.2
  Route15 0.6: v13.6,49.5 14.36,48.74 15.74,48.74 16.4,49.4 22.6,49.4 25,51.8 v31.2,51.8
  Bottom 0.4: IC1.13 13.47,26.73 12.8,27.4 v12.8,29
SIG_P2  (via drill 0.2)
  Top 0.6: v28.5,12.3 28.5,6.6 30.84,4.26 R16.2
  Route15 0.6: v11,29 11,27.1 13.5,24.6 13.5,16.3 18.3,11.5 27.7,11.5 v28.5,12.3
  Bottom 0.4: IC1.11 11.13,25.77 11,25.9 v11,29
SWCLK  (via drill 0.2)
  Route15 0.4: v19.1,29 19.1,29.5 17.3,31.3 9.6,31.3 8,32.9 JP2.3
  Bottom 0.4: v19.1,29 19.1,25.77 IC1.20
SWDIO  (via drill 0.2)
  Route15 0.4: v18.2,29 18.2,29.6 17.1,30.7 4.4,30.7 2.92,32.18 JP2.1
  Bottom 0.4: IC1.19 17.37,26.9 18,26.9 18.2,27.1 v18.2,29
UART_RX  (via drill 0.2 pad 0.5)
  Route2 0.5: 4.91,20 J1.1 | 4.91,20 J2.1 | 4.91,20 v7.9,20
  Bottom 0.5: v7.9,20 10.53,20 11.78,18.75 12.56,18.75 12.82,19.01 IC1.9
VCC  (via drill 0.35, 0.4)
  Top 1.1: v18.7,34.1 18.7,35 19.7,36 23.1,36 24.03,36.93 D6.1 24.03,42.13 P2.S | D5.1 27.51,24.25 P1.S
  Top 2: P2.S 21.3,44.86 21.3,56.4 22.05,57.15 v26.4,57.15
  Route2 2: P1.S 25.2,18.75 | 25.2,18.75 23.37,16.92 JP1.2 | 25.2,18.75 26.84,18.75 26.85,18.75 30.7,14.9 44.07,14.9 46.7,12.28 56.62,12.28 58.7,10.2 62.2,10.2 65,13 65,25.78 | v26.4,57.15 27.75,57.15 30.15,54.75 43.05,54.75 46.05,57.75 57.15,57.75 58.65,59.25 60.45,59.25 65,54.7 65,44.5 | 53.52,23.95 PS2.2
  Route2 6: PS2.2 55.74,24.08 57.49,22.33 61.55,22.33
  Route2 6.5: PS3.1 53.55,45.8 55.7,45.8 57.49,47.58 61.55,47.58 62.63,46.5 63,46.5 65,44.5 65,25.78 61.55,22.33
  Bottom 0.4: 23.37,14.67 JP1.2
  Bottom 0.6: R10.2 26.92,15.93 26.41,16.44 25.14,16.44 23.37,14.67 | R9.2 26.64,57.15 v26.4,57.15
  Bottom 1.1: v18.7,34.1 20.95,34.1 R5.2 | R5.2 | R5.2 R6.2
  other vias: 25.2,21.93
~12V  (via drill 0.35)
  Top 1: C2.2 65.77,37.3 IC2.VOUT
  Top 1.1: v60.5,39.5 63.57,39.5 | 63.57,39.5 IC2.VOUT | 63.57,39.5 63.57,59.13 57.4,65.3 45.05,65.3 C4.1
  Route15 0.5: v34.4,24.8 34.5,24.8
  Route15 1.1: 36.7,24.8 36.7,25 36.9,25.2 36.9,42.2 33.8,45.3 v33.6,45.3 v32.1,45.3 | 36.7,24.8 36.7,23.9 41,19.6 56.6,19.6 57.32,20.32 57.32,28.14 59.58,30.4 v60.5,30.4 v60.5,39.5 | 36.7,24.8 v34.4,24.8 v33.4,23.8 32.4,23.8 25.91,17.31 JP1.1
  Bottom 0.5: R20.2 34.75,40.45
  Bottom 1: IC3.3 62.77,32.62 C5.2
  Bottom 1.1: IC3.3 60.55,30.4 v60.5,30.4 | v33.6,45.3 v32.1,45.3 32.1,43.4 33.6,41.9 34.6,41.9 35,41.5 R20.2 | v33.4,23.8 v34.4,24.8 35,25.4 R21.2

## Text on the board
bNames: Native / address